# Altium PCB DC DC Board.PcbDoc
Units mm, origin at the board's own origin, x right, y up, seen from the top; angles counter-clockwise.
Board outline 99 x 99 mm, 2 copper layers (Top Layer, Bottom Layer); 61 components, 29 nets, 142 pads, 3 vias.
Unrouted connection lines stored in the file: 23.
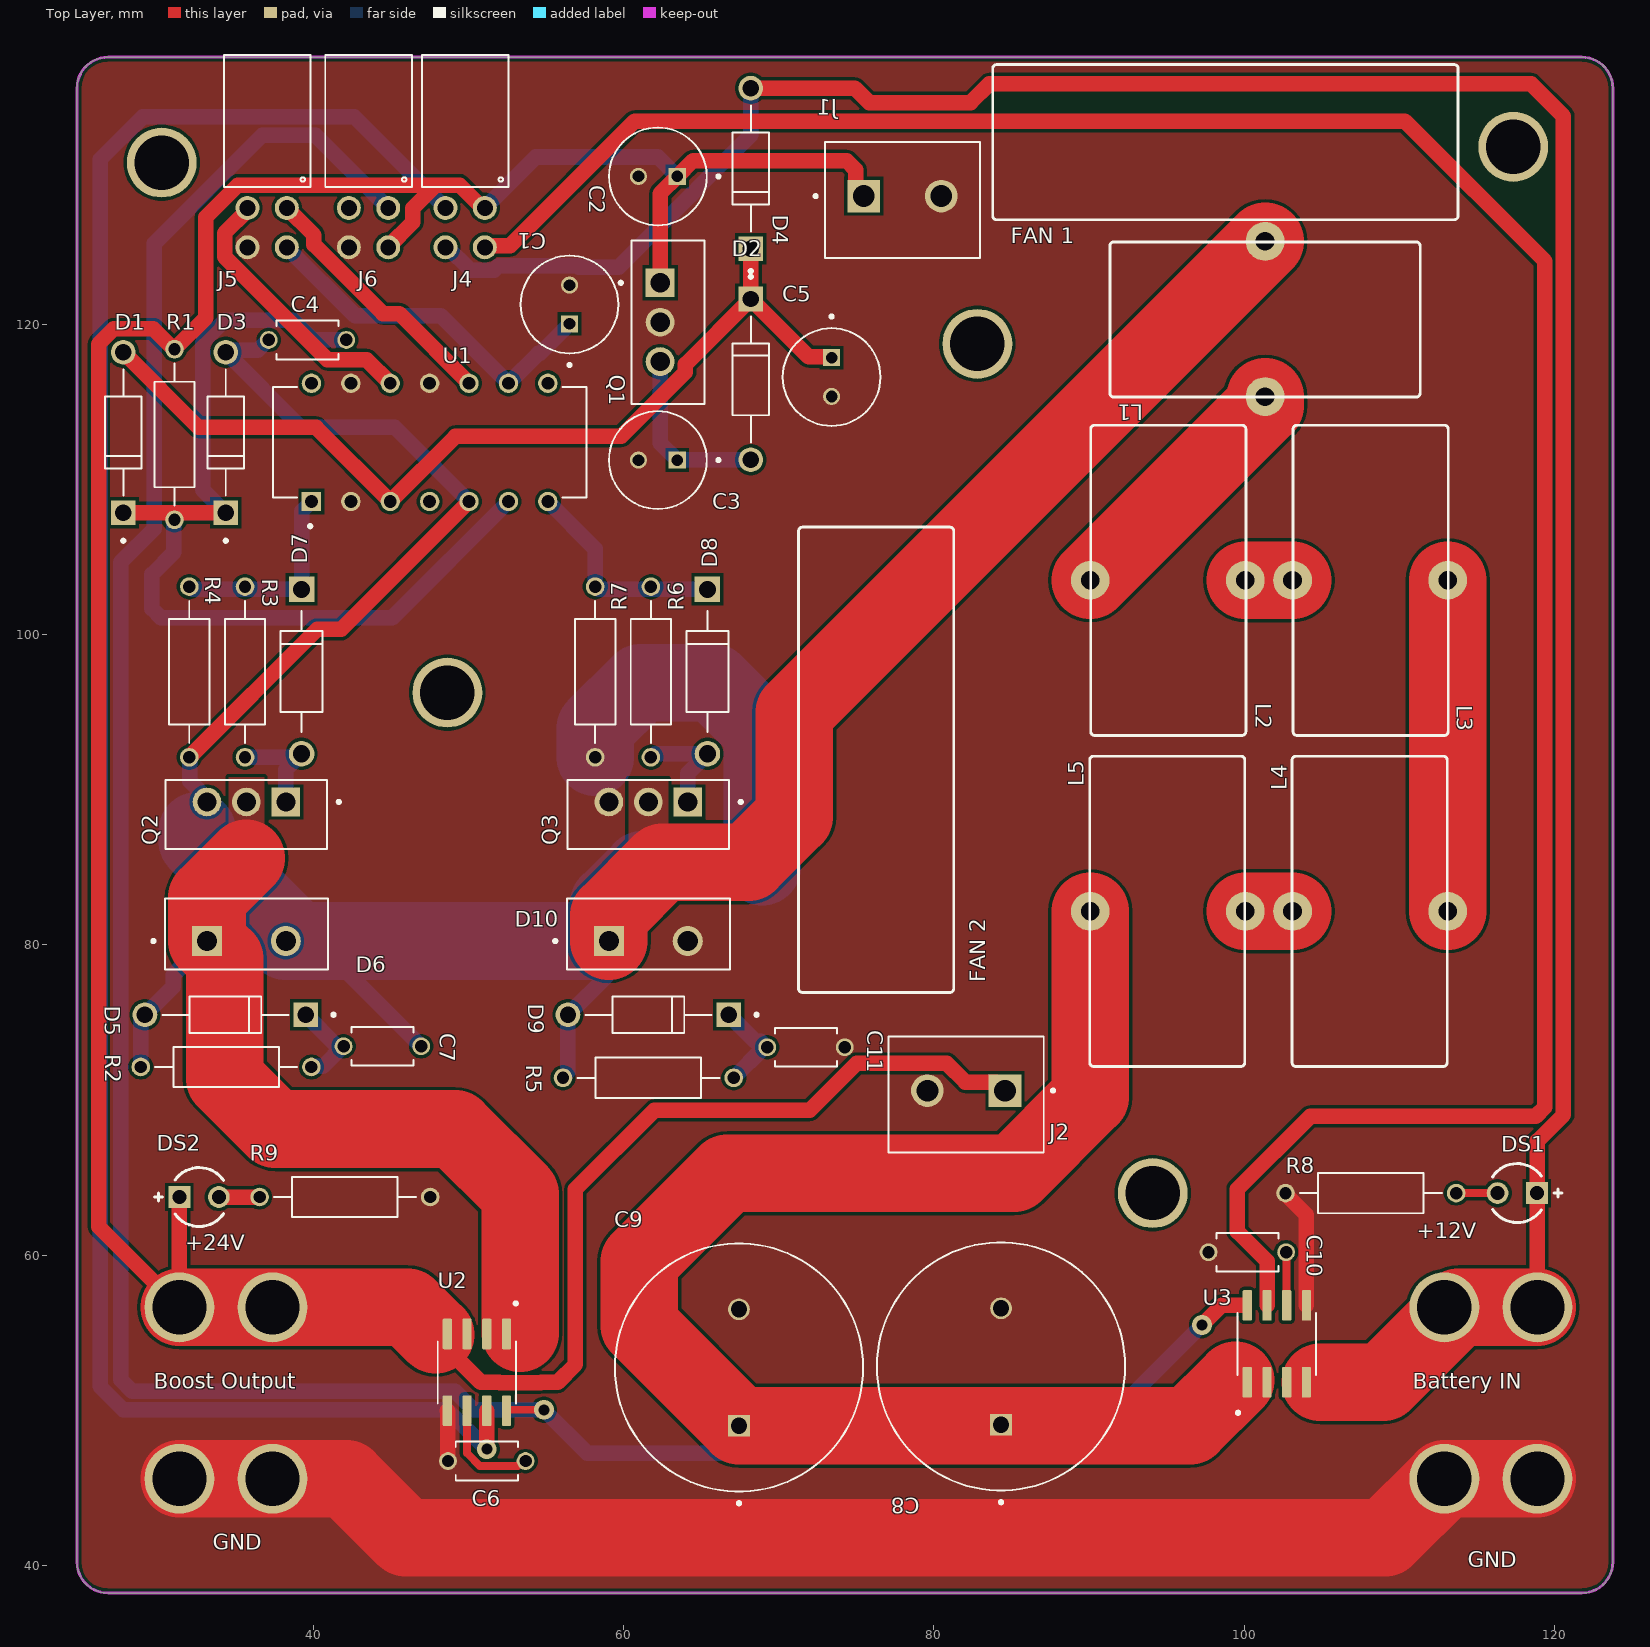
[diagram p0: Top Layer view]
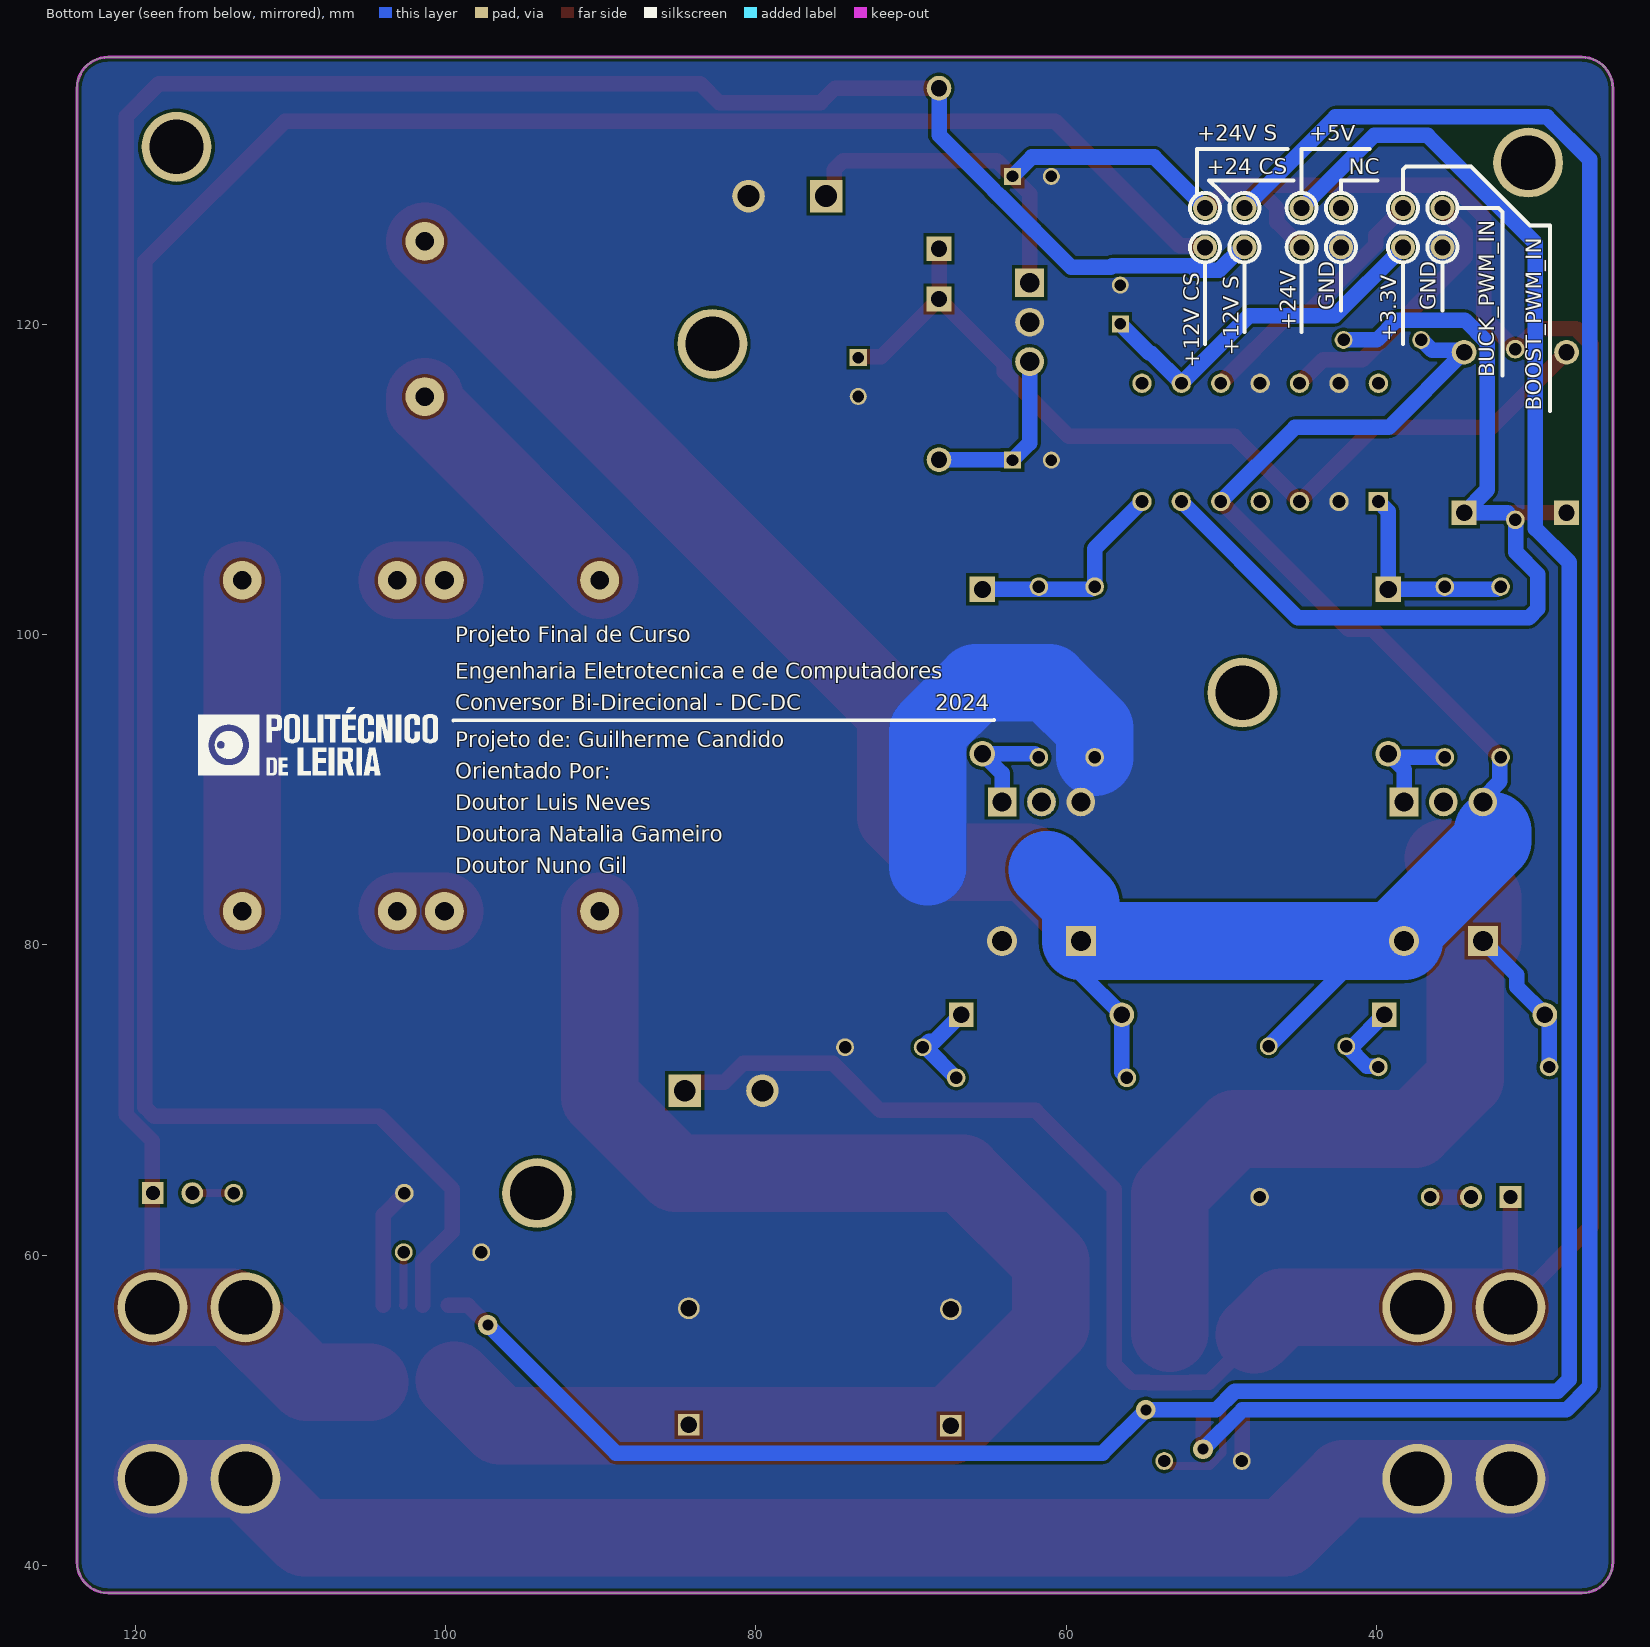
[diagram p1: Bottom Layer view, seen from below]
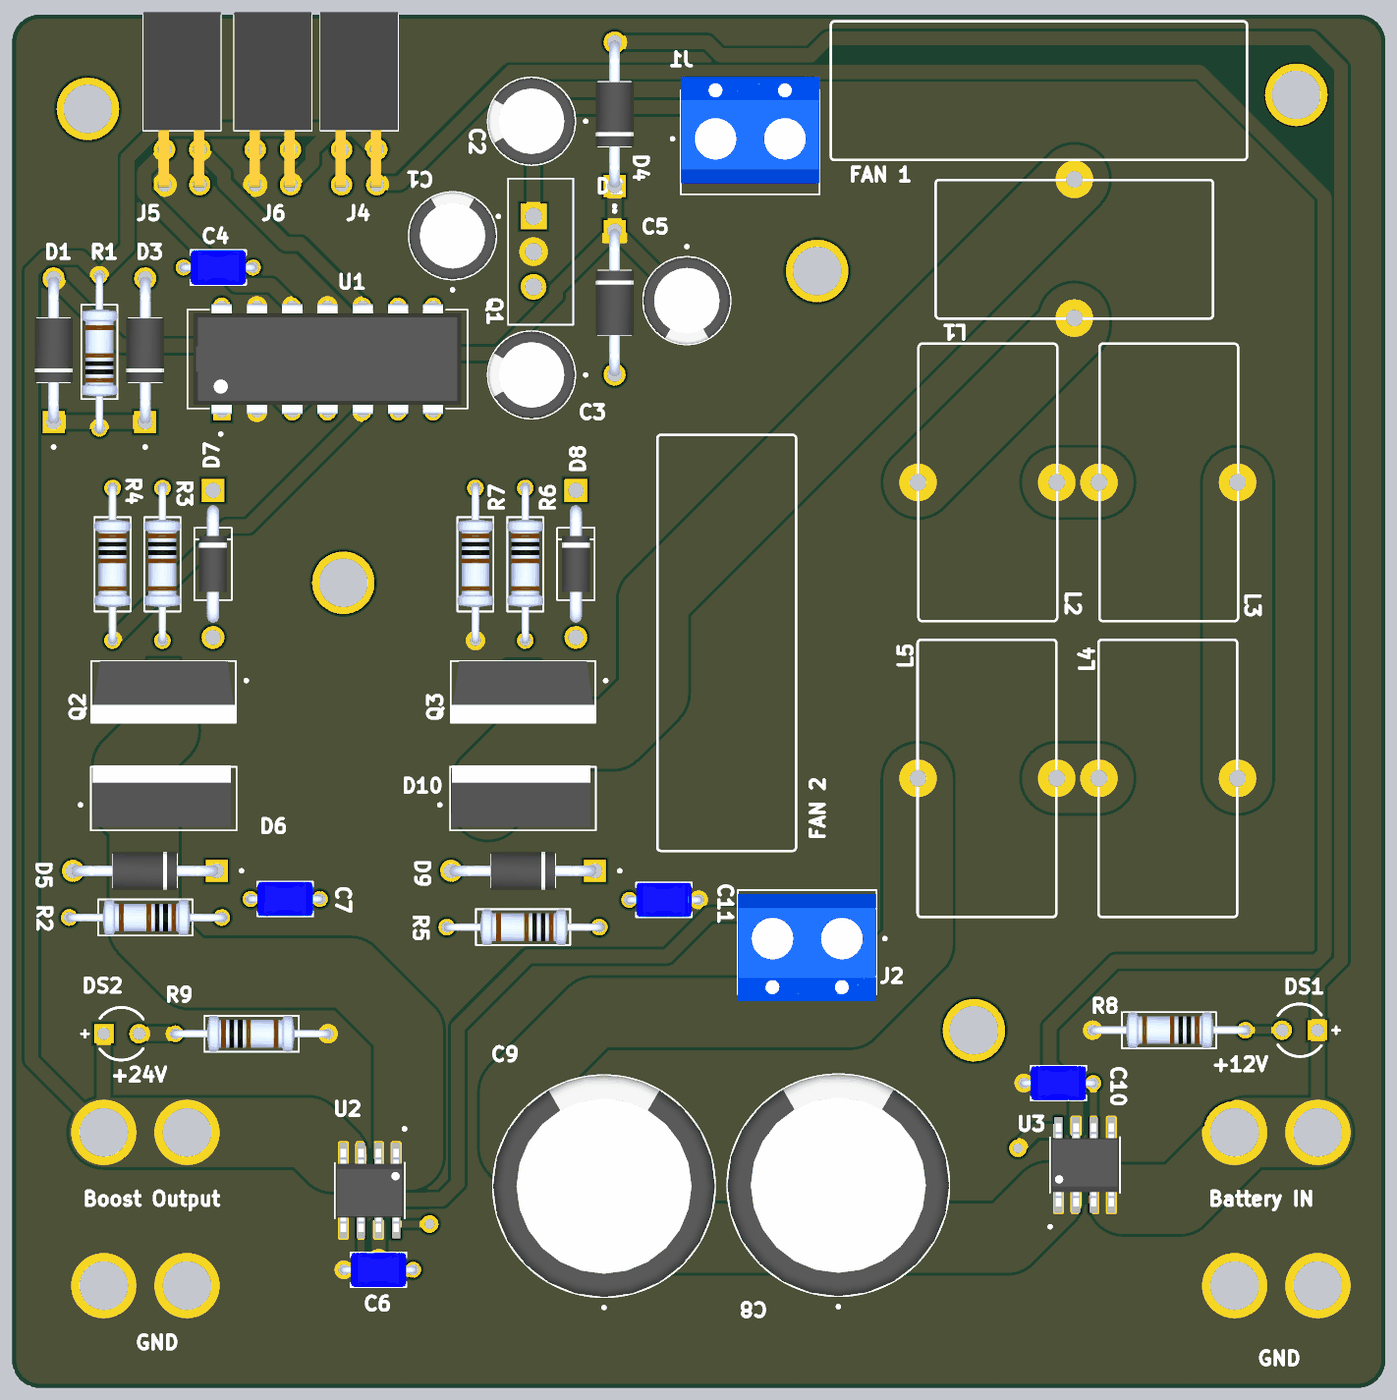
[diagram p2: 3D render of the assembled board from above, using the file's embedded part models]

## Layer stack, top to bottom
Top Solder: solder mask 0.0102, Solder Resist, Dk 3.5
Top Layer: signal copper 0.0356
Dielectric 1: dielectric 0.32, FR-4, Dk 4.8
Bottom Layer: signal copper 0.0356
Bottom Solder: solder mask 0.0102, Solder Resist, Dk 3.5

## Board outline
24.765,40.227 24.765,135.227 cw(c26.765,135.227) 26.765,137.227 121.765,137.227 cw(c121.765,135.227) 123.765,135.227 123.765,40.227 cw(c121.765,40.227) 121.765,38.227 26.765,38.227 cw(c26.765,40.227)

## Design rules (kind name [scope] priority, off if disabled: settings)
Clearance [All] p1: gap=0.2 ignorepadtopadclearanceinfootprint=TRUE
HoleSize [All] p1: absolutevalues=TRUE maxlimit=6.3 minlimit=0.3 maxpercent=80.000 minpercent=20.000
HoleToHoleClearance [All] p1: gap=0.5 allowstackedmicrovias=TRUE
PolygonConnect DirectConnect [All] p1: connectstyle=Direct reliefconductorwidth=0.254 reliefentries=4 polygonreliefangle="90 Angle" airgapwidth=0.254
PolygonConnect [All] p2: connectstyle=Relief reliefconductorwidth=0.254 reliefentries=4 polygonreliefangle="90 Angle" airgapwidth=0.254
RoutingVias [All] p1: holewidth=0.711 width=1.27 viastyle="Through Hole" minholewidth=0.3 minwidth=0.5 maxholewidth=6.3 maxwidth=10
SilkToSilkClearance [All] p1: silktosilkclearance=0
SolderMaskExpansion [All] p1: expansion=0.102 istentingtop=FALSE
UnRoutedNet [All] p1: checkbadconnections=TRUE
Width [All] p1: maxlimit=5 minlimit=0.127 preferedwidth=0.5 minimp=50.000000 maximp=50.000000 favimp=50.000000
26 further rules are at their usual default settings.

## Classes and differential pairs
component class IR2110: C1 C2 C3 C4 C5 D1 D2 D3 D4 Q1 R1 U1
component class Connectors: DS1 DS2 J1 J2 J4 J5 J6 R8 R9
component class Bi_Dir_Circuit: C6 C7 C8 C9 C10 C11 D5 D6 D7 D8 D9 D10 L1 L2 L3 L4 L5 Q2 Q3 R2 R3 R4 R5 R6 R7 U2 U3

## Components (designator, comment, footprint, x,y, rotation, side; value= is the part's Value field where it differs from the comment)
1 "M3 Mounting Hole" "M3 - Mounting Hole"#1 31.369,56.642 r0 top
2 "M3 Mounting Hole" "M3 - Mounting Hole"#2 37.338,56.642 r0 top
3 "M3 Mounting Hole" "M3 - Mounting Hole"#3 32.766,45.593 r0 top
4 "M3 Mounting Hole" "M3 - Mounting Hole"#4 38.735,45.593 r0 top
5 "M3 Mounting Hole" "M3 - Mounting Hole"#5 29.591,130.429 r0 top
6 "M3 Mounting Hole" "M3 - Mounting Hole"#1 82.804,118.745 r0 top
7 "M3 Mounting Hole" "M3 - Mounting Hole"#1 117.348,131.445 r0 top
8 "M3 Mounting Hole" "M3 - Mounting Hole"#1 94.107,64.008 r0 top
9 "M3 Mounting Hole" "M3 - Mounting Hole"#6 112.903,48.514 r0 top
10 "M3 Mounting Hole" "M3 - Mounting Hole"#7 118.872,48.514 r0 top
11 "M3 Mounting Hole" "M3 - Mounting Hole"#8 111.76,57.531 r0 top
12 "M3 Mounting Hole" "M3 - Mounting Hole"#9 117.729,57.531 r0 top
13 "M3 Mounting Hole" "M3 - Mounting Hole"#1 48.641,96.266 r0 top
C1 "10uF Cap" CAP_10uF 56.515,121.285 r90 top
C2 "10uF Cap" CAP_10uF 62.21,129.54 r180 top
C3 "10uF" CAP_10uF 62.21,111.252 r180 top
C4 "0.1uF" "Ceramic Capacitor" 39.624,118.999 r0 top
C5 "10uF Cap" CAP_10uF 73.406,116.606 r270 top
C6 "1nF" "Ceramic Capacitor" 51.181,46.736 r0 top
C7 "Ceramic Capacitor" "Ceramic Capacitor" 44.45,73.469 r180 top
C8 "10uF Cap" 2200uF_Cap 84.328,52.832 r90 top
C9 "10uF Cap" 2200uF_Cap 67.437,52.765 r90 top
C10 "1nF" "Ceramic Capacitor" 100.203,60.198 r0 top
C11 "Ceramic Capacitor" "Ceramic Capacitor" 71.755,73.406 r180 top
D1 "Fast-Rect Diode" "Common Trhough Hole" 27.752,113.03 r90 top
D2 "Schottky Diode" "Common Trhough Hole" 68.199,116.459 r270 top
D3 "1N4110" "Common Trhough Hole" 34.356,113.03 r90 top
D4 "Schottky Diode" "Common Trhough Hole" 68.199,130.048 r90 top
D5 "Normal Diode" "Common Trhough Hole" 34.329,75.501 r180 top
D6 "MBR10100" MBR10100 35.687,80.708 r0 top
D7 "1N4148" "1N4007 DIODE" 39.243,97.624 r270 top
D8 "1N4148" "1N4007 DIODE" 65.405,97.624 r270 top
D9 "Normal Diode" "Common Trhough Hole" 61.595,75.501 r180 top
D10 "MBR10100" MBR10100 61.595,80.708 r0 top
DS1 "LTL-1CHE" LED3mm 117.602,64.008 r180 top
DS2 "LTL-1CHE" LED3mm 32.639,63.754 r0 top
J1 "KF301-2P" KF301-2P 77.978,128.27 r0 top
J2 "KF301-2P" KF301-2P 82.082,70.612 r180 top
J4 "2x4-POS 2.54mm Header" "2x4-POS 2.54mm Header" 49.784,126.238 r180 top
J5 "2x4-POS 2.54mm Header" "2x4-POS 2.54mm Header" 37.02,126.238 r180 top
J6 "2x4-POS 2.54mm Header" "2x4-POS 2.54mm Header" 43.56,126.238 r180 top
L1 "Coil_62125" "Coil 65125" 101.346,125.349 r270 top
L2 "Coil_62125" "Coil 65125" 90.076,103.505 r0 top
L3 "Coil_62125" "Coil 65125" 103.117,103.505 r0 top
L4 "Coil_62125" "Coil 65125" 113.117,82.169 r180 top
L5 "Coil_62125" "Coil 65125" 100.076,82.169 r180 top
Q1 "LM7805CT" LM7805CT 62.357,120.142 r270 top
Q2 "IRF530NPBF" IRF530N 35.687,88.407 r180 top
Q3 "IRF530NPBF" IRF530N 61.595,88.407 r180 top
R1 "Resistor" "Resistor_Through Hole" 31.054,112.903 r90 top
R2 "Resistor" "Resistor_Through Hole" 34.378,72.136 r180 top
R3 "15R" "Resistor_Through Hole" 35.598,97.599 r270 top
R4 "10K" "Resistor_Through Hole" 32.004,97.599 r270 top
R5 "Resistor" "Resistor_Through Hole" 61.595,71.437 r180 top
R6 "15R" "Resistor_Through Hole" 61.76,97.599 r270 top
R7 "10K" "Resistor_Through Hole" 58.166,97.599 r270 top
R8 "Resistor_Through Hole" "Resistor_Through Hole" 108.165,64.008 r180 top
R9 "Resistor_Through Hole" "Resistor_Through Hole" 42.037,63.754 r0 top
U1 "IR2110" IR2110 47.498,112.395 r90 top
U2 "ACS712" ACS712 50.546,52.451 r270 top
U3 "ACS712" ACS712 102.108,54.291 r90 top

## Footprints (in the part's own frame and the unit in brackets; to place one, negate y for a bottom-side part, rotate by r counter-clockwise, add the part's x,y. Pads: shape width x height; smd on the part's side, far side on the other; paste and mask are expansions set on the pad)
"1N4007 DIODE" [mm]
  round 1.65 hole 1.1: A(5.3,0)
  rect 1.65x1.65 / inner round 1.65 / far side rect 1.65x1.65 hole 1.1: C(-5.3,0)
  silkscreen extent -3.9,-1.35 3.9,1.35, body extent -4.24,-1 4.24,1, height 2
"2x4-POS 2.54mm Header" [mm]
  round 1.545 hole 1.03: 1(-1.27,-1.27) 2(-1.27,1.27) 3(1.27,-1.27) 4(1.27,1.27)
  silkscreen extent -2.79,-11.13 2.79,-2.63, body extent -2.79,-11.15 2.79,1.45, height 5.02
2200uF_Cap [mm]
  round 1.4 hole 1.05: N(3.75,0)
  rect 1.4x1.4 hole 1.05: P(-3.75,0)
  silkscreen extent -8.85,-8 8,8, body extent -8,-8 8,8, height 31.5
ACS712 [mm]
  rrect25% 1.97x0.6 smd: 1(-2.475,1.905) 2(-2.475,0.635) 3(-2.475,-0.635) 4(-2.475,-1.905) 5(2.475,-1.905) 6(2.475,-0.635) 7(2.475,0.635) 8(2.475,1.905)
  silkscreen extent -4.54,-2.52 2,2.6, body extent -3,-2.45 3,2.45, height 1.75
CAP_10uF [mm]
  round 1.1 hole 0.75: N(1.25,0)
  rect 1.1x1.1 hole 0.75: P(-1.25,0)
  silkscreen extent -4,-3.15 3.15,3.15, body extent -3.15,-3.15 3.15,3.15, height 11.2
"Ceramic Capacitor" [mm] "22pF"
  round 1.15 hole 0.8: 1(-2.5,0) 2(2.5,0)
  silkscreen extent -2,-1.25 2,1.25, body extent -2.75,-1.25 2.75,1.25, height 5.5
"Coil 65125" [mm]
  round 2.5 hole 1.2: 1(0,0) 2(10,0)
  silkscreen extent 0.03,-10 10.03,10
"Common Trhough Hole" [mm]
  rect 1.59x1.59 / inner round 1.59 / far side rect 1.59x1.59 hole 1.06: 1(-5.18,0)
  round 1.59 hole 1.06: 2(5.18,0)
  silkscreen extent -7.07,-1.19 4.07,1.19, body extent -5.29,-1.36 5.29,1.36, height 2.72
IR2110 [mm]
  rect 1.25x1.25 / inner round 1.25 / far side rect 1.25x1.25 hole 0.83: 1(-3.81,7.62)
  round 1.25 hole 0.83: 2(-3.81,5.08) 3(-3.81,2.54) 4(-3.81,0) 5(-3.81,-2.54) 6(-3.81,-5.08) 7(-3.81,-7.62) 8(3.81,-7.62) 9(3.81,-5.08) 10(3.81,-2.54) 11(3.81,0) 12(3.81,2.54) 13(3.81,5.08) 14(3.81,7.62)
  silkscreen extent -5.5,-10.1 3.56,10.1, body extent -3.96,-9.65 3.96,9.65, height 5.33
IRF530N [mm]
  rect 1.845x1.845 hole 1.23: 1(-2.54,-0.81)
  round 1.845 hole 1.23: 2(0,-0.81) 3(2.54,-0.81)
  silkscreen extent -6.06,-2.22 5.21,2.22, body extent -5.21,-2.22 5.21,2.22, height 19.3
KF301-2P [mm]
  rect 2.1x2.1 hole 1.4: 1(-2.5,0)
  round 2.1 hole 1.4: 2(2.5,0)
  silkscreen extent -5.7,-4 5,3.5, body extent -5,-3.2 5,4.5, height 10
LED3mm [mm] "THD, 2-Leads, Dia 3.8mm, Pitch 2.54mm"
  rect 1.4x1.4 hole 0.9: 1(-1.27,0)
  round 1.4 hole 0.9: 2(1.27,0)
  silkscreen extent -2.87,-1.9 1.58,1.9, body extent -1.9,-1.9 1.9,1.9, height 6.5
LM7805CT [mm]
  rect 1.86x1.86 hole 1.24: 1(-2.54,0)
  round 1.86 hole 1.24: 2(0,0) 3(2.54,0)
  silkscreen extent -5.27,-2.64 5.27,2.86
"M3 - Mounting Hole"#1 [mm]
  round 4.5 / inner round 1.524 / far side round 4.5 hole 3.5: 1(0,0)
"M3 - Mounting Hole"#2 [mm]
  round 4.5 / inner round 1.524 / far side round 4.5 hole 3.5: 1(0.031,0)
"M3 - Mounting Hole"#3 [mm]
  round 4.5 / inner round 1.524 / far side round 4.5 hole 3.5: 1(-1.397,0)
"M3 - Mounting Hole"#4 [mm]
  round 4.5 / inner round 1.524 / far side round 4.5 hole 3.5: 1(-1.366,0)
"M3 - Mounting Hole"#5 [mm]
  round 4.5 / inner round 1.524 / far side round 4.5 hole 3.5: 1(0.635,0)
"M3 - Mounting Hole"#6 [mm]
  round 4.5 / inner round 1.524 / far side round 4.5 hole 3.5: 1(0,-2.921)
"M3 - Mounting Hole"#7 [mm]
  round 4.5 / inner round 1.524 / far side round 4.5 hole 3.5: 1(0.031,-2.921)
"M3 - Mounting Hole"#8 [mm]
  round 4.5 / inner round 1.524 / far side round 4.5 hole 3.5: 1(1.143,-0.889)
"M3 - Mounting Hole"#9 [mm]
  round 4.5 / inner round 1.524 / far side round 4.5 hole 3.5: 1(1.174,-0.889)
MBR10100 [mm]
  rect 1.94x1.94 / inner round 1.94 / far side rect 1.94x1.94 hole 1.29: 1(-2.54,-0.453)
  round 1.94 hole 1.29: 3(2.54,-0.453)
  silkscreen extent -6.1,-2.29 5.25,2.29, body extent -5.11,-2.03 4.86,2.41, height 19.05
"Resistor_Through Hole" [mm]
  round 1.2 hole 0.8: 1(-5.5,0) 2(5.5,0)
  silkscreen extent -4.58,-1.3 4.58,1.3, body extent -5.84,-1.29 5.71,1.29, height 2.6

## Part data
C1 C2 C5 C8 C9: "CAP ALUM 10UF 20% 50V RADIAL", Package="RADIAL-2 Panasonic", Availability="In Stock", Check_prices=https://www.snapeda.com/parts/ECE-A1HN100UI/Panasonic/view-part/2321690/?ref=eda, MF=Panasonic, MP=ECE-A1HN100UI, Price=None, SnapEDA_Link=https://www.snapeda.com/parts/ECE-A1HN100UI/Panasonic/view-part/2321690/?ref=snap
C3: library part "10uF Cap", "CAP ALUM 10UF 20% 50V RADIAL", Package="RADIAL-2 Panasonic", Availability="In Stock", Check_prices=https://www.snapeda.com/parts/ECE-A1HN100UI/Panasonic/view-part/2321690/?ref=eda, MF=Panasonic, MP=ECE-A1HN100UI, Price=None, SnapEDA_Link=https://www.snapeda.com/parts/ECE-A1HN100UI/Panasonic/view-part/2321690/?ref=snap
C4 C6 C10: library part "Ceramic Capacitor", Package="0805 AVX", Availability="In Stock", Check_prices=https://www.snapeda.com/parts/LD051A121KAB2A/AVX/view-part/?ref=eda, MF=AVX, MP=LD051A121KAB2A, Price=None, Purchase-URL=https://pricing.snapeda.com/search/part/LD051A121KAB2A/?ref=eda, SnapEDA_Link=https://www.snapeda.com/parts/LD051A121KAB2A/AVX/view-part/?ref=snap
C7 C11: Package="0805 AVX", Availability="In Stock", Check_prices=https://www.snapeda.com/parts/LD051A121KAB2A/AVX/view-part/?ref=eda, MF=AVX, MP=LD051A121KAB2A, Price=None, Purchase-URL=https://pricing.snapeda.com/search/part/LD051A121KAB2A/?ref=eda, SnapEDA_Link=https://www.snapeda.com/parts/LD051A121KAB2A/AVX/view-part/?ref=snap
D1: library part "Normal Diode", Package="DO-41 NTE Electronics", Availability="In Stock", Check_prices=https://www.snapeda.com/parts/1N4007/NTE+Electronics/view-part/?ref=eda, MF="NTE Electronics, Inc.", MP=1N4007, Price=None, Purchase-URL=https://pricing.snapeda.com/search/part/1N4007/?ref=eda, SnapEDA_Link=https://www.snapeda.com/parts/1N4007/NTE+Electronics/view-part/?ref=snap
D2 D4 D6 D10: Package="DO-41 Diodes Inc.", Availability="In Stock", Check_prices=https://www.snapeda.com/parts/1N5817-T/Diodes+Inc./view-part/?ref=eda, MF="Diodes Inc.", MP=1N5817-T, Price=None, Purchase-URL=https://pricing.snapeda.com/search/part/1N5817-T/?ref=eda, SnapEDA_Link=https://www.snapeda.com/parts/1N5817-T/Diodes+Inc./view-part/?ref=snap
D3: library part "Zener Diode", Package="SMA-2 Taiwan Semiconductor", Availability="In Stock", Check_prices=https://www.snapeda.com/parts/1SMA5926/Taiwan+Semiconductor/view-part/?ref=eda, MF="Taiwan Semiconductor", MP=1SMA5926, Price=None, Purchase-URL=https://pricing.snapeda.com/search/part/1SMA5926/?ref=eda, SnapEDA_Link=https://www.snapeda.com/parts/1SMA5926/Taiwan+Semiconductor/view-part/?ref=snap
D5 D9: Package="DO-41 NTE Electronics", Availability="In Stock", Check_prices=https://www.snapeda.com/parts/1N4007/NTE+Electronics/view-part/?ref=eda, MF="NTE Electronics, Inc.", MP=1N4007, Price=None, Purchase-URL=https://pricing.snapeda.com/search/part/1N4007/?ref=eda, SnapEDA_Link=https://www.snapeda.com/parts/1N4007/NTE+Electronics/view-part/?ref=snap
D7 D8: library part 1N4007, "Diode Standard 1000 V 1A Through Hole DO-41", Package="DO-41 NTE Electronics", Availability="In Stock", Check_prices=https://www.snapeda.com/parts/1N4007/NTE+Electronics/view-part/?ref=eda, MF="NTE Electronics, Inc.", MP=1N4007, Price=None, Purchase-URL=https://pricing.snapeda.com/search/part/1N4007/?ref=eda, SnapEDA_Link=https://www.snapeda.com/parts/1N4007/NTE+Electronics/view-part/?ref=snap
DS1 DS2: library part "RED_LED 3mm", "Radial LED, 12.6 mcd, 20 mA, 2 V, -55 to 100 degC, 2-Pin THD, RoHS, Bulk", Case\Package=Radial, Current Rating="3.6 A", Max Operating Temperature="130 degC", Min Operating Temperature="-40 degC", Package Quantity=55, Resistance="0.045 Ohm", Tolerance=20%, ComponentLink1Description="Manufacturer URL", ComponentLink1URL=http://www.us.liteon.com/, ComponentLink2Description=Datasheet, ComponentLink2URL=https://datasheet.ciiva.com/15117/getdatasheetpartid-187746-15117985.pdf, DatasheetVersion=Dec-03, Height="1.1 inch", Lead Pitch="11.44 mm", Length="0.97 inch", Mount="Through Hole", PackageDescription="2-Pin Through Hole Device, Dia 3.8 mm, Pitch 2.54 mm", PackageReference=LTL-1CHE, Packaging=Tray, Radiation Hardening=No, RoHSCompliant=true, Shielding=Unshielded, Width="0.62 inch"
J1 J2: "2 Pin Terminal Block 5mm Pitch", Package=None, Availability=Unavailable, MP=KF301-2P, Price=None
J4 J5 J6: "Female header [WÃ¼rth Elektronik] 613004243121 Female header", Package=None, Availability=Unavailable, Check_prices=https://www.snapeda.com/parts/613004243121/W%C3%BCrth%20Elektronik/view-part/1737074/?ref=eda, MF="WÃ¼rth Elektronik", MP=613004243121, Price=None, SnapEDA_Link=https://www.snapeda.com/parts/613004243121/W%C3%BCrth%20Elektronik/view-part/1737074/?ref=snap
L1 L2 L3 L4 L5: "Inductor Power Wirewound 470uH 10% 1KHz 25Q-Factor Ferrite 210mA 3.3Ohm DCR T/R", Package="Nonstandard Bourns", Digi-Key_Part_Number=SDR0604-471KLCT-ND, Digi-Key_Purchase_URL=https://www.digikey.com/product-detail/en/bourns-inc/SDR0604-471KL/SDR0604-471KLCT-ND/2352941?utm_source=snapeda&utm_medium=aggregator&utm_campaign=symbol, MF=Bourns, MP=SDR0604-471KL, SnapEDA_Link=https://www.snapeda.com/parts/SDR0604-471KL/Bourns/view-part/567387/?ref=snap
Q1: Package=None, Availability=Unavailable, MP=LM7805CT/NOPB, Price=None
Q2 Q3: "RoHS Compliant", Package="TO-220 Infineon", Availability="In Stock", Check_prices=https://www.snapeda.com/parts/IRF530NPBF/Infineon+Technologies/view-part/?ref=eda, MF="Infineon Technologies", MP=IRF530NPBF, Price=None, Purchase-URL=https://pricing.snapeda.com/search/part/IRF530NPBF/?ref=eda, SnapEDA_Link=https://www.snapeda.com/parts/IRF530NPBF/Infineon+Technologies/view-part/?ref=snap
R1 R2 R5: Package=0805, Power_Rating=".25 W", Resistance=.33, Tolerance=1%, Availability="In Stock", Check_prices=https://www.snapeda.com/parts/2-2176053-0/TE+Connectivity/view-part/?ref=eda, EU_RoHS_Compliance="Compliant with Exemptions", MF="TE Connectivity", MP=2-2176053-0, Price=None, SnapEDA_Link=https://www.snapeda.com/parts/2-2176053-0/TE+Connectivity/view-part/?ref=snap
R3 R6: library part "Resistor_Through Hole", "1.02 Ohms Â±1% 0.25W, 1/4W Through Hole Resistor Axial Metal Film", Package="Axial Yageo", Availability=Warning, Check_prices=https://www.snapeda.com/parts/MFR-25FTE52-1R/Yageo/view-part/4629919/?ref=eda, MF=Yageo, MP=MFR-25FTE52-1R, Price=None, Purchase-URL=https://pricing.snapeda.com/search/part/MFR-25FTE52-1R/?ref=eda, SnapEDA_Link=https://www.snapeda.com/parts/MFR-25FTE52-1R/Yageo/view-part/4629919/?ref=snap
R4 R7: library part Resistor, Package=0805, Power_Rating=".25 W", Resistance=.33, Tolerance=1%, Availability="In Stock", Check_prices=https://www.snapeda.com/parts/2-2176053-0/TE+Connectivity/view-part/?ref=eda, EU_RoHS_Compliance="Compliant with Exemptions", MF="TE Connectivity", MP=2-2176053-0, Price=None, SnapEDA_Link=https://www.snapeda.com/parts/2-2176053-0/TE+Connectivity/view-part/?ref=snap
R8 R9: "1.02 Ohms Â±1% 0.25W, 1/4W Through Hole Resistor Axial Metal Film", Package="Axial Yageo", Availability=Warning, Check_prices=https://www.snapeda.com/parts/MFR-25FTE52-1R/Yageo/view-part/4629919/?ref=eda, MF=Yageo, MP=MFR-25FTE52-1R, Price=None, Purchase-URL=https://pricing.snapeda.com/search/part/MFR-25FTE52-1R/?ref=eda, SnapEDA_Link=https://www.snapeda.com/parts/MFR-25FTE52-1R/Yageo/view-part/4629919/?ref=snap
U1: "Half-Bridge Gate Driver IC Non-Inverting 16-SOIC", Package="SOIC-16 International Rectifier", Availability="In Stock", Check_prices=https://www.snapeda.com/parts/IR2110/Infineon+Technologies/view-part/?ref=eda, MF=Infineon, MP=IR2110, Price=None, Purchase-URL=https://pricing.snapeda.com/search/part/IR2110/?ref=eda, SnapEDA_Link=https://www.snapeda.com/parts/IR2110/Infineon+Technologies/view-part/?ref=snap
U2 U3: "Current Sensor 5A 1 Channel Hall Effect, Open Loop Bidirectional 8-SOIC (0.154, 3.90mm Width)", Package="SOIC-8 Allegro MicroSystems LLC", Availability="In Stock", Check_prices=https://www.snapeda.com/parts/ACS712ELCTR-05B-T/Allegro+MicroSystems+LLC/view-part/?ref=eda, MF="Allegro MicroSystems LLC", MP=ACS712ELCTR-05B-T, Price=None, Purchase-URL=https://pricing.snapeda.com/search/part/ACS712ELCTR-05B-T/?ref=eda, SnapEDA_Link=https://www.snapeda.com/parts/ACS712ELCTR-05B-T/Allegro+MicroSystems+LLC/view-part/?ref=snap

## Via types
v1: diameter 1.27, hole 0.711, Top Layer to Bottom Layer, 3 vias

## Nets (pads, with @x,y where several pads share a name; then routed paths per layer and width w, separated by ;. In a path a pad name is that pad's centre, name@x,y a point inside that pad or via, vN(x,y) a via of type N, cw(c..) or ccw(c..) an arc to the next point about the centre after c; other vN are vias at no path point)
+3.3: C1.P J5.2 U1.9 | length 23.4
  Bottom Layer w1: J5.2 42.7,120.558 48.225,120.558 U1.9 54.509,118.136 54.616,118.136 C1.P
+5: J6.1 U2.8 U3.8 | length 174.6
  Top Layer w0.5: U2.8 52.451,49.988 52.501,50.038 v1(54.864,50.038)
  Top Layer w1: v1(97.282,55.499) 98.549,56.766 99.822,56.766
  Bottom Layer w1: J6.1 40.159,132.179 36.703,132.179 29.754,125.23 29.754,106.843 27.578,104.667 27.578,51.981 28.321,51.238 49.138,51.238 50.338,50.038 v1(54.864,50.038) 57.658,47.244 89.027,47.244 v1(97.282,55.499)
+12: 11.1 12.1 D4.2 DS1.1 J4.4 U3.3 U3.4 | length 174.6
  Top Layer w1: D4.2 74.899,135.228 75.831,134.296 82.37,134.296 83.583,135.509 118.491,135.509 120.58,133.42 120.58,69.05 118.903,67.373 12.1
  Top Layer w5: 104.902,51.816 108.966,51.816 113.792,56.642 12.1
  Bottom Layer w1: J4.4 48.661,124.968 50.134,123.495 51.664,123.495 51.953,123.785 57.033,123.785 57.12,123.698 59.69,123.698 64.282,128.29 64.3,128.29 64.71,128.7 64.71,128.718 68.199,132.207 D4.2
+24: 1.1 2.1 C2.P DS2.1 J1.1 J2.1 J4.1 J6.2 Q1.1 R1.2 U2.3 U2.4 | length 218.1
  Top Layer w1: DS2.1 1.1 26.162,61.849 26.162,118.735 27.132,119.705 29.697,119.705 30.999,118.403 R1.2 33.078,120.427 33.078,126.918 35.14,128.981 47.904,128.981 ; J6.2 44.83,125.003 46.419,126.593 46.419,127.496 47.904,128.981 ; 47.879,54.864 47.879,54.727 50.79,51.816 51.99,51.816 52.015,51.791 54.665,51.791 54.69,51.816 55.753,51.816 56.896,52.959 56.896,64.262 61.976,69.342 71.994,69.342 75.014,72.362 80.832,72.362 82.032,71.162 84.032,71.162 J2.1 ; J4.1 50.907,127.508 49.434,128.981 47.904,128.981 ; Q1.1 62.357,128.437 C2.P 64.476,130.556 74.371,130.556 74.957,129.97 74.957,128.791 J1.1
  Top Layer w5: 1.1 2.1 46.101,56.642 47.879,54.864
  Bottom Layer w1: J4.1 54.336,130.79 62.21,130.79 C2.P
Driver_VCC: C5.P D1.2 D2.1 D4.1 U1.3 | length 60.1
  Top Layer w1: D1.2 32.597,113.365 40.178,113.365 U1.3 49.153,112.78 59.84,112.78 63.987,116.927 63.987,117.427 D2.1 ; D4.1 D2.1 ; C5.P 73.356,117.906 71.932,117.906 D2.1
GND: 3.1 4.1 9.1 10.1 C1.N C2.N C3.N C5.N C6.1 C8.N C9.N C10.1 C11.1 D10.3 J1.2 J2.2 J5.4 J6.4 Q1.2 Q3.3 R7.2 R8.2 R9.2 U1.2 U1.11 U1.13 U2.5 U3.5 | length 127.1
  Top Layer w1: U2.5 48.661,49.956 48.661,46.756 C6.1 ; R8.2 102.665,63.954 104.013,62.606 U3.5
  Top Layer w5: 3.1 42.137,45.593 45.947,41.783 109.093,41.783 9.1 10.1
  Bottom Layer w1: 58.204,90.296 59.055,89.446 Q3.3
  Bottom Layer w5: R7.2 58.166,93.972 61.095,96.901 65.813,96.901 68.93,93.784 68.93,85.05
NetC3_P: C3.P D2.2 Q1.3 | length 11.6
  Bottom Layer w1: Q1.3 62.357,112.355 C3.P 63.474,111.266 68.185,111.266 D2.2
NetC4_1: C4.1 C7.1 D3.2 D6.3 D9.2 D10.1 L1.1 Q2.3 Q3.2 R4.2 R5.2 U1.5 | length 172
  Top Layer w1: R4.2 40.242,100.337 41.79,100.337 U1.5
  Top Layer w5: D10.1 59.055,81.915 62.484,85.344 68.064,85.344 70.993,88.273 70.993,94.996 L1.1
  Bottom Layer w1: R4.2 32.042,92.061 32.042,90.55 33.147,89.446 Q2.3 ; C4.1 37.083,118.999 36.407,118.323 34.468,118.323 D3.2 39.201,113.365 45.258,113.365 U1.5 ; 40.344,80.075 C7.1 ; R5.2 56.095,71.491 56.415,71.811 D9.2 59.055,78.141 D10.1
  Bottom Layer w5: 32.512,87.376 32.512,86.673 38.227,80.958 D6.3 D10.1 59.055,82.677 61.214,84.836
NetC4_2: C4.2 D1.1 D3.1 R1.1 U1.6 | length 64.1
  Top Layer w1: D1.1 D3.1
  Bottom Layer w1: R1.1 31.015,107.365 31.015,105.311 29.591,103.886 29.591,101.678 30.177,101.092 45.085,101.092 U1.6 ; 31.555,107.85 D3.1 32.861,109.345 32.861,118.829 34.305,120.274 38.702,120.274 39.977,118.999 C4.2
NetC6_2: C6.2 U2.6 | length 7
  Top Layer w0.5: U2.6 49.911,47.234 50.732,46.413 53.182,46.413 53.505,46.736 C6.2
NetC7_2: C7.2 D5.1 R2.1 | length 5.9
  Bottom Layer w1: D5.1 41.512,73.498 41.921,73.498 C7.2 ; R2.1 39.916,72.174 40.615,72.174 C7.2@41.909,73.469
NetC8_P: C8.P C9.P L5.2 U3.1 U3.2 | length 91.9
  Top Layer w5: L5.2 90.076,70.188 85.166,65.278 66.675,65.278 60.996,59.599 60.996,55.456 C9.P 84.328,49.015 96.513,49.015 99.441,51.943
NetC10_2: C10.2 U3.6 | length 3.4
  Top Layer w0.5: C10.2 102.723,60.178 102.723,56.786 U3.6
NetC11_2: C11.2 D9.1 R5.1 | length 6.1
  Bottom Layer w1: D9.1 68.484,73.792 68.829,73.792 69.214,73.406 C11.2 ; R5.1 C11.2@69.035,73.377
NetD5_2: D5.2 D6.1 Q2.2 R2.2 U2.1 U2.2 | length 56.7
  Top Layer w5: 35.687,85.598 33.147,83.058 D6.1 34.29,79.112 34.29,71.382 37.535,68.137 49.141,68.137 53.34,63.938 53.34,54.991
  Bottom Layer w1: R2.2 28.878,75.07 29.149,75.341 D5.2 30.969,77.321 30.969,78.077 D6.1
NetD7_A: D7.A Q2.1 R3.2 | length 7.3
  Bottom Layer w1: R3.2 38.842,92.099 39.067,92.324 D7.A 38.227,91.308 Q2.1
NetD7_C: D7.C R3.1 R4.1 U1.1 | length 13.2
  Bottom Layer w1: R4.1 32.058,103.099 32.233,102.924 D7.C 39.243,107.95 U1.1
NetD8_A: D8.A Q3.1 R6.2 | length 7.4
  Bottom Layer w1: R6.2 61.815,92.099 62.04,92.324 D8.A 64.135,91.054 Q3.1
NetD8_C: D8.C R6.1 R7.1 U1.7 | length 14.1
  Bottom Layer w1: U1.7 58.166,105.537 R7.1 58.22,103.099 58.395,102.924 D8.C
NetDS1_2: DS1.2 R8.1 | length 2.7
  Top Layer w0.5: R8.1 DS1.2
NetDS2_2: DS2.2 R9.1 | length 2.6
  Top Layer w1: DS2.2 R9.1
NetJ4_2: J4.2 U3.7 | length 160.2
  Top Layer w1: J4.2 51.158,125.072 52.682,125.072 60.706,133.096 110.363,133.096 119.38,124.079 119.38,69.547 118.794,68.961 104.267,68.961 99.568,64.262 99.568,61.53 101.473,59.625 U3.7
NetJ4_3: J4.3 U2.7 | length 134
  Top Layer w1: v1(51.181,47.498) U2.7
  Bottom Layer w1: J4.3 42.643,133.379 29.004,133.379 26.257,130.631 26.257,51.545 27.764,50.038 48.641,50.038 v1(51.181,47.498)
NetJ5_1: J5.1 U1.10 | length 16.8
  Top Layer w1: J5.1 40.037,125.761 40.037,125.138 44.48,120.696 45.547,120.696 U1.10
NetJ5_3: J5.3 U1.12 | length 17.8
  Top Layer w1: J5.3 35.75,127.361 34.278,125.888 34.278,124.358 40.912,117.724 43.439,117.724 U1.12
NetL1_2: L1.2 L2.1 | length 16.5
  Top Layer w5: L2.1 101.346,114.775 L1.2
NetL2_2: L2.2 L3.1 | length 3
  Top Layer w5: L2.2 L3.1
NetL3_2: L3.2 L4.1 | length 21.3
  Top Layer w5: L4.1 L3.2
NetL4_2: L4.2 L5.1 | length 3
  Top Layer w5: L5.1 L4.2
pads on no net: 5.1 6.1 7.1 8.1 13.1 J6.3 U1.4 U1.8 U1.14

## Polygon pours and split planes (outlines as drawn)
GND on Top Layer "GND_L01_P004" (solid, remove dead copper, pour order 4): 24.765,40.227 24.765,135.227 cw(c26.765,135.227) 26.765,137.227 121.765,137.227 cw(c121.765,135.227) 123.765,135.227 123.765,40.227 cw(c121.765,40.227) 121.765,38.227 26.765,38.227 cw(c26.765,40.227)
NetC4_1 on Top Layer "NETC4_1_L01_P000" (solid, remove dead copper, pour order 0): 60.325,90.678 62.865,90.678 62.865,85.09 60.325,85.09
NetD5_2 on Top Layer "NETD5_2_L01_P001" (solid, remove dead copper, pour order 1): 34.544,90.805 36.83,90.805 36.83,85.598 34.544,85.598
GND on Bottom Layer "GND_L02_P002" (solid, remove dead copper, pour order 2): 24.765,40.227 24.765,135.227 cw(c26.765,135.227) 26.765,137.227 121.765,137.227 cw(c121.765,135.227) 123.765,135.227 123.765,40.227 cw(c121.765,40.227) 121.765,38.227 26.765,38.227 cw(c26.765,40.227)
NetC4_1 on Bottom Layer "NETC4_1_L02_P003" (solid, remove dead copper, pour order 3): 60.325,90.678 62.865,90.678 62.865,85.09 60.325,85.09

## Keep-outs
Keep-Out Layer:
  the board outline again, w0.18

## Silkscreen, mask and mechanical layers (free items; w line width, h text height)
Top Overlay:
  lines w0.18: 71.28,77.188 ccw(c71.534,77.188) 71.534,76.934 81.026,76.934 ccw(c81.026,77.188) 81.28,77.188 81.28,106.68 ccw(c81.026,106.68) 81.026,106.934 71.534,106.934 ccw(c71.534,106.68) 71.28,106.68 71.28,77.188 ; 83.792,127 ccw(c84.046,127) 84.046,126.746 113.538,126.746 ccw(c113.538,127) 113.792,127 113.792,136.492 ccw(c113.538,136.492) 113.538,136.746 84.046,136.746 ccw(c84.046,136.492) 83.792,136.492 83.792,127
  text "FAN 1" at 84.963,125.222 h1
  text "FAN 2" at 83.312,77.597 h1 r90
  text "+12V" at 111.125,61.087 h1
  text "+24V" at 31.75,60.325 h1
  text "Boost Output" at 29.718,51.387 h1
  text "Battery IN" at 110.871,51.387 h1
  text "GND" at 33.528,41.021 h1
  text "GND" at 114.427,39.878 h1
Bottom Overlay:
  drawing of 62 lines, arcs and shapes, not listed
  text "+5V" at 44.323,131.826 h1
  text "+24V S" at 51.562,131.826 h1
  text "NC" at 41.783,129.667 h1
  text "+24 CS" at 50.927,129.667 h1
  text "GND" at 36.195,120.904 h1 r270
  text "GND" at 42.735,120.904 h1 r270
  text "+24V" at 45.212,119.634 h1 r270
  text "+3.3V" at 38.735,118.872 h1 r270
  text "+12V S" at 48.895,117.983 h1 r270
  text "+12V CS" at 51.435,117.221 h1 r270
  text "BUCK_PWM_IN" at 32.425,116.586 h1 r270
  text "BOOST_PWM_IN" at 29.377,114.427 h1 r270
  text "Projeto Final de Curso" at 99.385,99.52 h1
  text "Engenharia Eletrotecnica e de Computadores" at 99.385,97.155 h1
  text "2024" at 68.453,95.123 h1
  text "Conversor Bi-Direcional - DC-DC" at 99.385,95.124 h1
  text "Projeto de: Guilherme Candido" at 99.385,92.759 h1
  text "Orientado Por:" at 99.385,90.727 h1
  text "Doutor Luis Neves" at 99.385,88.696 h1
  text "Doutora Natalia Gameiro" at 99.385,86.664 h1
  text "Doutor Nuno Gil" at 99.385,84.633 h1